# Altium PCB EN-C200_RA2.PcbDoc (part 1 of 3)
Units mil, origin at the board's own origin, x right, y up, seen from the top; angles counter-clockwise.
Board outline 4940 x 2525 mil, 2 copper layers (TOP, BOTTOM), stack 39.8 mil thick; 190 components, 128 nets, 643 pads, 1902 vias.
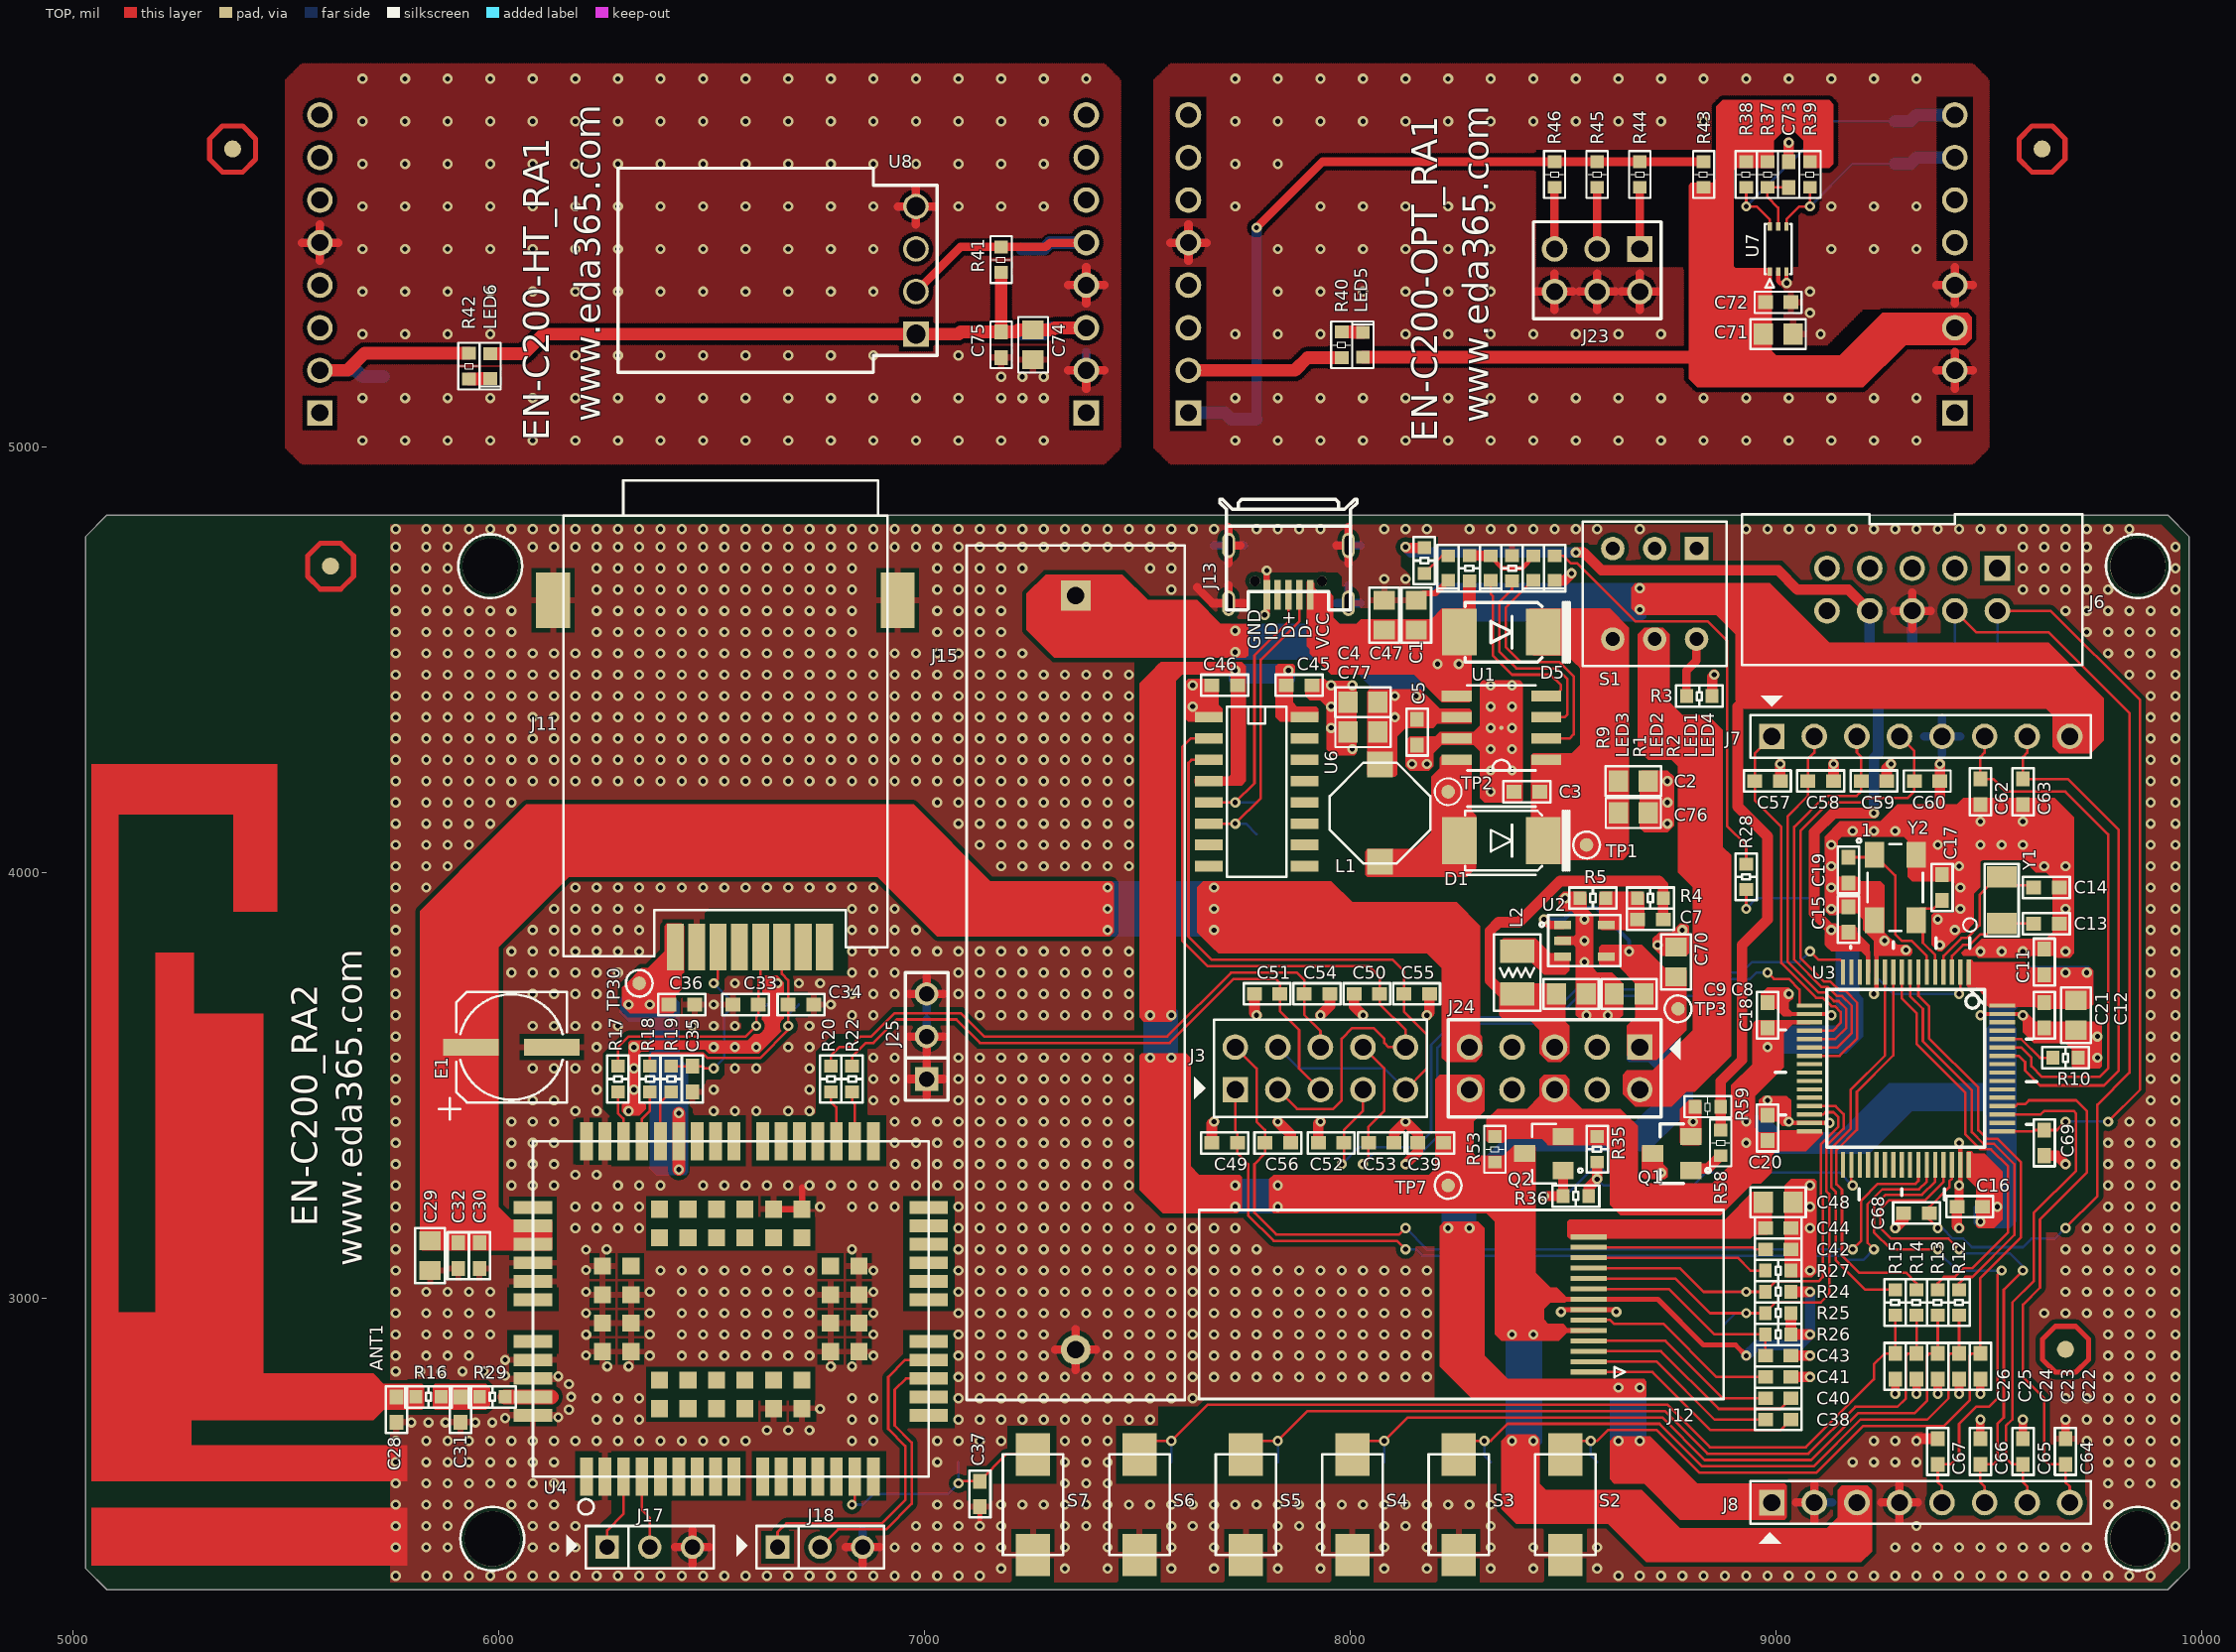
[diagram p0: TOP view]
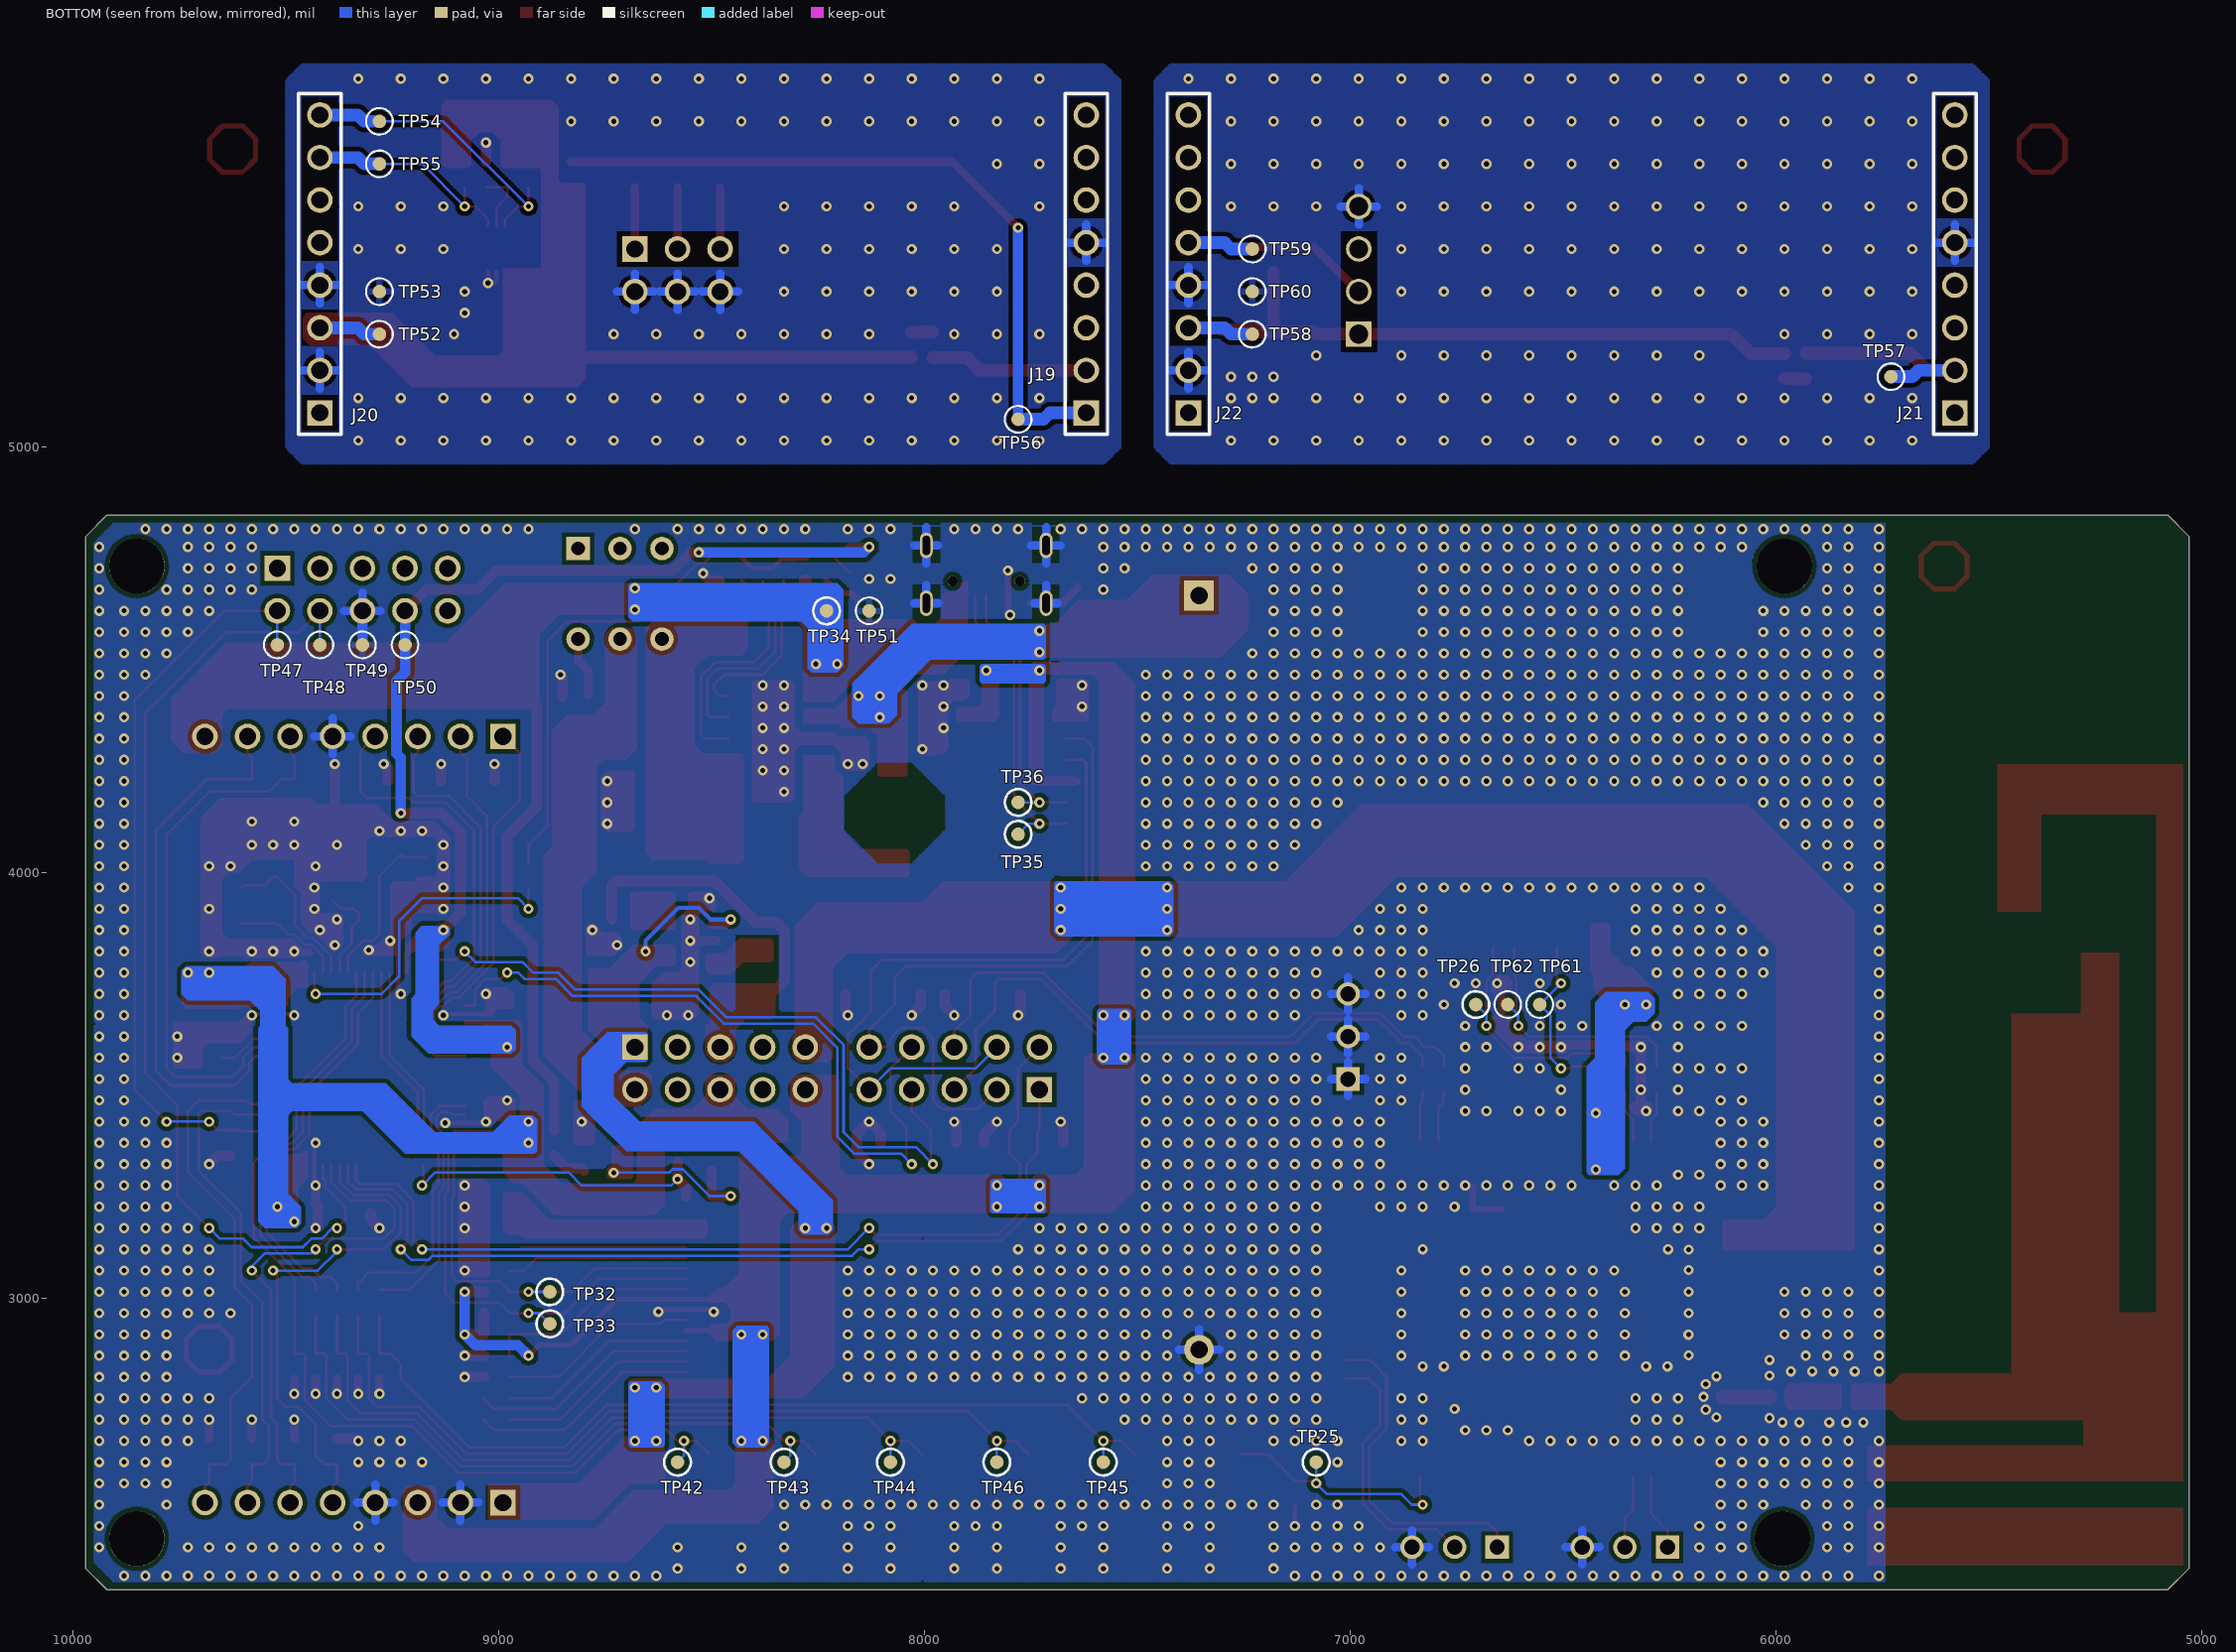
[diagram p1: BOTTOM view, seen from below]

## Layer stack, top to bottom
TOP: signal copper 1.4
Dielectric: core 37, FR-4, Dk 1
BOTTOM: signal copper 1.4

## Board outline
5030,2365 5080,2315 9920,2315 9970,2365 9970,4790 9920,4840 5080,4840 5030,4790

## Design rules (kind name [scope] priority, off if disabled: settings)
Clearance [(OnLayer('Keep-Out Layer'))] p1: gap=12
Clearance Clearance_2 [inpoly] p2: gap=10
Clearance Clearance_1 [All] p3: gap=6
ComponentClearance [All] p1: gap=-10 collisioncheckmode=3 verticalgap=-10 showdistances=FALSE
HoleSize [All] p1: absolutevalues=TRUE maxlimit=1000 minlimit=1 maxpercent=80.000 minpercent=20.000
PlaneConnect [All] p1: planeconnectstyle=Direct reliefexpansion=20 reliefentries=4 reliefconductorwidth=10 reliefairgap=10
PolygonConnect PolygonConnect_via [isvia] p1: connectstyle=Direct reliefconductorwidth=10 reliefentries=4 polygonreliefangle="90 Angle"
PolygonConnect [All] p2: connectstyle=Relief reliefconductorwidth=15 reliefentries=4 polygonreliefangle="90 Angle"
RoutingVias [All] p1: holewidth=12 width=24 viastyle="Through Hole" minholewidth=12 minwidth=24 maxholewidth=12 maxwidth=24
SilkToSilkClearance [All] p1: silktosilkclearance=1
SilkscreenOverComponentPads SilkToSolderMaskClearance [IsPad] p1: minsilkscreentomaskgap=2
SolderMaskExpansion [All] p1: expansion=2
Width [All] p1: maxlimit=100 minlimit=4 preferedwidth=10
23 further rules are at their usual default settings.

## Components (designator, comment, footprint, x,y, rotation, side; value= is the part's Value field where it differs from the comment)
C1 "CAP NP_SC0805_22UF" SC0805 8155,4605 r90 top
C2 "CAP NP_SC0805_22UF" SC0805 8665,4215 r0 top
C3 "CAP NP_SC0603_100NF" SC0603 8415,4190 r180 top
C4 "CAP NP_SC0805_22UF" SC0805 8030,4400 r180 top
C5 "CAP NP_SC0603_100NF" SC0603 8157,4330 r90 top
C7 "CAP NP_SC0603_5.6PF" SC0603 8705,3890 r180 top
C8 "CAP NP_SC0805_22UF" SC0805 8655,3715 r180 top
C9 "CAP NP_SC0805_22UF" SC0805 8519,3715 r0 top
C11 "CAP NP_SC0603_100NF" SC0603 9630,3790 r90 top
C12 "CAP NP_SC0805_22UF" SC0805 9705,3665 r270 top
C13 "CAP NP_SC0603_2.7PF" SC0603 9635,3880 r180 top
C14 "CAP NP_SC0603_2.7PF" SC0603 9635,3965 r180 top
C15 "CAP NP_SC0603_100NF" SC0603 9170,3890 r90 top
C16 "CAP NP_SC0603_100NF" SC0603 9455,3215 r0 top
C17 "CAP NP_SC0603_20PF" SC0603 9390,3965 r270 top
C18 "CAP NP_SC0603_100NF" SC0603 8980,3665 r270 top
C19 "CAP NP_SC0603_20PF" SC0603 9170,4006 r90 top
C20 "CAP NP_SC0603_100NF" SC0603 8980,3400 r270 top
C21 "CAP NP_SC0603_100NF" SC0603 9630,3665 r270 top
C22 "CAP NP_SC0603_10NF" SC0603 9480,2840 r270 top
C23 "CAP NP_SC0603_100NF" SC0603 9430,2840 r270 top
C24 "CAP NP_SC0603_100NF" SC0603 9380,2840 r270 top
C25 "CAP NP_SC0603_100NF" SC0603 9330,2840 r270 top
C26 "CAP NP_SC0603_100NF" SC0603 9280,2840 r270 top
C28 "CAP NP_SC0603_NC" SC0603 5760,2738.31 r90 top
C29 "CAP NP_SC0805_22UF" SC0805 5839,3100 r90 top
C30 "CAP NP_SC0603_20PF" SC0603 5955,3100 r90 top
C31 "CAP NP_SC0603_NC" SC0603 5910,2738.31 r90 top
C32 "CAP NP_SC0603_100NF" SC0603 5905,3100 r90 top
C33 "CAP NP_SC0603_33PF" SC0603 6580,3690 r180 top
C34 "CAP NP_SC0603_33PF" SC0603 6710,3690 r0 top
C35 "CAP NP_SC0603_33PF" SC0603 6455,3515 r270 top
C36 "CAP NP_SC0603_100NF" SC0603 6430,3690 r0 top
C37 "CAP NP_SC0603_100NF" SC0603 7130,2540 r90 top
C38 "CAP NP_SC0603_1UF" SC0603 9005,2715 r0 top
C39 "CAP NP_SC0603_100NF" SC0603 8189,3365 r0 top
C40 "CAP NP_SC0603_1UF" SC0603 9005,2765 r0 top
C41 "CAP NP_SC0603_NC" SC0603 9005,2815 r180 top
C42 "CAP NP_SC0603_1UF" SC0603 9005,3115 r180 top
C43 "CAP NP_SC0603_1UF" SC0603 9005,2865 r180 top
C44 "CAP NP_SC0603_100NF" SC0603 9005,3165 r180 top
C45 "CAP NP_SC0603_100NF" SC0603 7880,4440 r0 top
C46 "CAP NP_SC0603_100NF" SC0603 7705,4440 r0 top
C47 "CAP NP_SC0805_22UF" SC0805 8080,4605 r270 top
C48 "CAP NP_SC0805_22UF" SC0805 9005,3225 r180 top
C49 "CAP NP_SC0603_33PF" SC0603 7705,3365 r0 top
C50 "CAP NP_SC0603_33PF" SC0603 8039,3715 r0 top
C51 "CAP NP_SC0603_33PF" SC0603 7805,3715 r0 top
C52 "CAP NP_SC0603_33PF" SC0603 7955,3365 r0 top
C53 "CAP NP_SC0603_33PF" SC0603 8073,3365 r180 top
C54 "CAP NP_SC0603_33PF" SC0603 7922,3715 r180 top
C55 "CAP NP_SC0603_33PF" SC0603 8156,3715 r180 top
C56 "CAP NP_SC0603_33PF" SC0603 7830,3365 r180 top
C57 "CAP NP_SC0603_33PF" SC0603 8980,4215 r180 top
C58 "CAP NP_SC0603_33PF" SC0603 9105,4215 r180 top
C59 "CAP NP_SC0603_33PF" SC0603 9230,4215 r180 top
C60 "CAP NP_SC0603_33PF" SC0603 9355,4215 r180 top
C62 "CAP NP_SC0603_33PF" SC0603 9480,4190 r90 top
C63 "CAP NP_SC0603_33PF" SC0603 9580,4190 r90 top
C64 "CAP NP_SC0603_33PF" SC0603 9680,2640 r270 top
C65 "CAP NP_SC0603_33PF" SC0603 9580,2640 r270 top
C66 "CAP NP_SC0603_33PF" SC0603 9480,2640 r270 top
C67 "CAP NP_SC0603_33PF" SC0603 9380,2640 r270 top
C68 "CAP NP_SC0603_33PF" SC0603 9330,3200 r0 top
C69 "CAP NP_SC0603_33PF" SC0603 9630,3365 r90 top
C70 "CAP NP_SC0805_22UF" SC0805 8765,3790 r90 top
C71 "CAP NP_SC0805_22UF" SC0805 9005,5265 r0 top
C72 "CAP NP_SC0603_100NF" SC0603 9005,5340 r0 top
C73 "CAP NP_SC0603_1UF" SC0603 9030,5640 r90 top
C74 "CAP NP_SC0805_22UF" SC0805 7255,5240 r270 top
C75 "CAP NP_SC0603_100NF" SC0603 7180,5240 r270 top
C76 "CAP NP_SC0805_22UF" SC0805 8665,4140 r0 top
C77 "CAP NP_SC0805_22UF" SC0805 8030,4330 r180 top
D1 "DIODE_SD1714_SM340A" SD1714 8360,4075 r0 top
D5 "DIODE_SD1714_SM340A" SD1714 8360,4565 r0 top
E1 "CAP POL_CAP_SMD_6_3MM_100UF/50V" CAP_SMD_6_3MM 6030,3590 r90 top
J3 "CON10A_SIP-2X5P-100_2X5 2.54MM" SIP-2X5P-100 7930,3540 r180 top
J6 "CON10A_SIP-2X5P-100-DS_2X5 2.54" SIP-2X5P-100-DS 9320,4665 r0 top
J7 "HEADER8_SIP-8P-100_SIP8-2.54M_1" SIP-8P-100 9340,4320 r0 top
J8 "HEADER8_SIP-8P-100_SIP8-2.54M_1" SIP-8P-100 9340,2520 r0 top
J11 "SIM8-PUSH_SIM8-50_475530001" SIM8-50 6533.31,4333.86 r90 top
J12 "OLED_0.91_FPC14-25_QG-2832TSWFG" FPC14-25 8259.84,2985.35 r90 top
J13 "MICROUSB_MICROUSB_D_MICROUSB" MICROUSB_D 7855,4764.76 r180 top
J15 "BX0034_BX0034_BATTERY HOLDER NO" BX0034 7355,3765 r90 top
J17 "HEADER3_SIP-3P_SIP3-2.54/NC" SIP-3P 6354,2416 r0 top
J18 "HEADER3_SIP-3P_SIP3-2.54/NC" SIP-3P 6754,2416 r0 top
J19 "HEADER8_SIP-8P-100_SIP8-2.54MM" SIP-8P-100 7620,5430 r90 bottom
J20 "HEADER8_SIP-8P-100_SIP8-2.54MM" SIP-8P-100 9420,5430 r90 bottom
J21 "HEADER8_SIP-8P-100_SIP8-2.54MM" SIP-8P-100 5580,5430 r90 bottom
J22 "HEADER8_SIP-8P-100_SIP8-2.54MM" SIP-8P-100 7380,5430 r90 bottom
J23 "CON2X3_SIP-2X3P-100_SIP2X3-2.54" SIP-2X3P-100 8580,5415 r0 top
J24 "CON10A_SIP-2X5P-100_2X5 2.54MM" SIP-2X5P-100 8480,3540 r0 top
J25 "HEADER3_SIP-3P_SIP3-2.54/NC" SIP-3P 7004,3614 r90 top
L1 "TOROID IRON_SPL0505B_10UH" SPL0505B 8070,4140 r180 top
L2 "TOROID IRON_SL1008_2.2UH" SL1008 8392,3765 r270 top
LED1 "LED_HSD0603-LED_LTST-C191KRKT" HSD0603-LED 8430,4715 r270 top
LED2 "LED_HSD0603-LED_LTST-C191KGKT" HSD0603-LED 8330,4715 r270 top
LED3 "LED_HSD0603-LED_LTST-C191KRKT" HSD0603-LED 8230,4715 r270 top
LED4 "LED_HSD0603-LED_LTST-C191KGKT" HSD0603-LED 8480,4715 r270 top
LED5 "LED_HSD0603-LED_LTST-C191KGKT" HSD0603-LED 8030,5240 r90 top
LED6 "LED_HSD0603-LED_LTST-C191KGKT" HSD0603-LED 5980,5190 r270 top
Q1 "MPF6661_SOT23_AO3400" SOT23 8755.4,3340 r90 top
Q2 "A03401_SOT23_AO3401" SOT23 8455.4,3340 r90 top
R1 "RESISTOR_SR0603_4.7K" SR0603 8280,4715 r90 top
R2 "RESISTOR_SR0603_4.7K" SR0603 8380,4715 r270 top
R3 "RESISTOR_SR0603_1K" SR0603 8820,4415 r180 top
R4 "RESISTOR_SR0603_249K" SR0603 8705,3940 r0 top
R5 "RESISTOR_SR0603_54.9K" SR0603 8570,3940 r0 top
R9 "RESISTOR_SR0603_4.7K" SR0603 8174,4733 r270 top
R10 "RESISTOR_SR0603_100K" SR0603 9680,3565 r180 top
R12 "RESISTOR_SR0603_10K" SR0603 9430,2990 r90 top
R13 "RESISTOR_SR0603_10K" SR0603 9380,2990 r90 top
R14 "RESISTOR_SR0603_10K" SR0603 9330,2990 r90 top
R15 "RESISTOR_SR0603_10K" SR0603 9280,2990 r90 top
R16 "RESISTOR_SR0603_0R" SR0603 5835,2768.31 r0 top
R17 "RESISTOR_SR0603_22R" SR0603 6280,3515 r270 top
R18 "RESISTOR_SR0603_22R" SR0603 6355,3515 r270 top
R19 "RESISTOR_SR0603_22R" SR0603 6405,3515 r270 top
R20 "RESISTOR_SR0603_22R" SR0603 6780,3515 r270 top
R22 "RESISTOR_SR0603_22R" SR0603 6830,3515 r270 top
R24 "RESISTOR_SR0603_10K" SR0603 9005,3015 r0 top
R25 "RESISTOR_SR0603_10K" SR0603 9005,2965 r0 top
R26 "RESISTOR_SR0603_10K" SR0603 9005,2915 r0 top
R27 "RESISTOR_SR0603_820K" SR0603 9005,3065 r180 top
R28 "RESISTOR_SR0603_4.7K" SR0603 8930,3990 r90 top
R29 "RESISTOR_SR0603_0R" SR0603 5985,2768.31 r0 top
R35 "RESISTOR_SR0603_10K" SR0603 8580,3350 r90 top
R36 "RESISTOR_SR0603_1K" SR0603 8530,3240 r0 top
R37 "RESISTOR_SR0603_1K" SR0603 8980,5640 r270 top
R38 "RESISTOR_SR0603_10K" SR0603 8930,5640 r90 top
R39 "RESISTOR_SR0603_10K" SR0603 9080,5640 r90 top
R40 "RESISTOR_SR0603_4.7K" SR0603 7980,5240 r90 top
R41 "RESISTOR_SR0603_4.7K" SR0603 7180,5440 r90 top
R42 "RESISTOR_SR0603_4.7K" SR0603 5930,5190 r270 top
R43 "RESISTOR_SR0603_10K" SR0603 8830,5640 r90 top
R44 "RESISTOR_SR0603_1K" SR0603 8680,5640 r270 top
R45 "RESISTOR_SR0603_10K" SR0603 8580,5640 r270 top
R46 "RESISTOR_SR0603_100K" SR0603 8480,5640 r270 top
R53 "RESISTOR_SR0603_0/NC" SR0603 8340,3350 r90 top
R58 "RESISTOR_SR0603_1K" SR0603 8870,3365 r270 top
R59 "RESISTOR_SR0603_100K" SR0603 8840,3450 r180 top
S1 "SW_PUSH6_SW2X3-100_K8-8585D-L2" SW2X3-100 8715,4655 r180 top
S2 "PUSH-KEY_SW2-240X140_SKQMASE010" SW2-240X140 8505,2515 r0 top
S3 "PUSH-KEY_SW2-240X140_SKQMASE010" SW2-240X140 8255,2515 r0 top
S4 "PUSH-KEY_SW2-240X140_SKQMASE010" SW2-240X140 8005,2515 r0 top
S5 "PUSH-KEY_SW2-240X140_SKQMASE010" SW2-240X140 7755,2515 r0 top
S6 "PUSH-KEY_SW2-240X140_SKQMASE010" SW2-240X140 7505,2515 r0 top
S7 "PUSH-KEY_SW2-240X140_SKQMASE010" SW2-240X140 7255,2515 r180 top
TP1 "TP_TP32-SMD_" TP32-SMD#1 8713,4170.3 r0 top
TP2 "TP_TP32-SMD_" TP32-SMD#2 8230,4190 r0 top
TP3 "TP_TP32-SMD_" TP32-SMD#1 8928,3785.3 r0 top
TP7 "TP_TP32-SMD_TP" TP32-SMD#3 8024,3159.7 r180 top
TP25 "TP_TP32-SMD_" TP32-SMD#4 6922,2720.3 r0 bottom
TP26 "TP_TP32-SMD_" TP32-SMD#4 6547,3795.3 r0 bottom
TP30 "TP_TP32-SMD_" TP32-SMD#5 6172,3638.75 r180 top
TP32 "TP_TP32-SMD_" TP32-SMD#6 9038,2918.75 r0 bottom
TP33 "TP_TP32-SMD_" TP32-SMD#1 9038,2834.7 r0 bottom
TP34 "TP_TP32-SMD_" TP32-SMD#1 8388,4509.7 r0 bottom
TP35 "TP_TP32-SMD_" TP32-SMD#1 7938,3984.7 r0 bottom
TP36 "TP_TP32-SMD_" TP32-SMD#7 7938,4081.25 r0 bottom
TP42 "TP_TP32-SMD_" TP32-SMD#1 8738,2509.7 r0 bottom
TP43 "TP_TP32-SMD_" TP32-SMD#1 8488,2509.7 r0 bottom
TP44 "TP_TP32-SMD_" TP32-SMD#1 8238,2509.7 r0 bottom
TP45 "TP_TP32-SMD_" TP32-SMD#1 7738,2509.7 r0 bottom
TP46 "TP_TP32-SMD_" TP32-SMD#1 7988,2509.7 r0 bottom
TP47 "TP_TP32-SMD_" TP32-SMD#2 9520,4535 r0 bottom
TP48 "TP_TP32-SMD_" TP32-SMD#2 9420,4535 r0 bottom
TP49 "TP_TP32-SMD_" TP32-SMD#2 9320,4535 r0 bottom
TP50 "TP_TP32-SMD_" TP32-SMD#2 9220,4535 r0 bottom
TP51 "TP_TP32-SMD_" TP32-SMD#2 8130,4615 r0 bottom
TP52 "TP_TP32-SMD_" TP32-SMD#2 9280,5265 r0 bottom
TP53 "TP_TP32-SMD_" TP32-SMD#2 9280,5365 r0 bottom
TP54 "TP_TP32-SMD_" TP32-SMD#2 9280,5765 r0 bottom
TP55 "TP_TP32-SMD_" TP32-SMD#2 9280,5665 r0 bottom
TP56 "TP_TP32-SMD_" TP32-SMD#2 7780,5065 r0 bottom
TP57 "TP_TP32-SMD_" TP32-SMD#2 5730,5165 r0 bottom
TP58 "TP_TP32-SMD_" TP32-SMD#2 7230,5265 r0 bottom
TP59 "TP_TP32-SMD_" TP32-SMD#2 7230,5465 r0 bottom
TP60 "TP_TP32-SMD_" TP32-SMD#2 7230,5365 r0 bottom
TP61 "TP_TP32-SMD_" TP32-SMD#2 6555,3690 r0 bottom
TP62 "TP_TP32-SMD_" TP32-SMD#2 6630,3690 r0 bottom
U1 "TP5400_SOP8-50-150B_TP5400" SOP8-50-150B 8355,4340 r90 top
U2 "RT8059_SOT23-5_RT8059GJ5" SOT23-5 8550,3840 r270 top
U3 "STM32L431RX_QFP64D-050-1010L_ST" QFP64D-050-1010L 9305,3540 r180 top
U4 "BC35-G_BC35-G_(S1+S2)_BC35-G" BC35-G 6545,2975 r90 top
U6 "CH340C_SOP16-50-150A_CH340C" SOP16-50-150A 7780,4190 r270 top
U7 "BH1750HVI_BH1730FVC-WSOF6_BH175" BH1730FVC-WSOF6 9005,5465 r90 top
U8 "DHT11_SIP4-100-A_DHT11" SIP4-100-A 6655,5415 r90 top
Y1 "CRYSTAL2P_FC-135_110_32.768KHZ" FC-135_110 9530,3935 r270 top
Y2 "CRYSTAL4P_HSX4-0503B_8MHZ" HSX4-0503B 9280,3965 r270 top

## Footprints (in the part's own frame and the unit in brackets; to place one, negate y for a bottom-side part, rotate by r counter-clockwise, add the part's x,y. Pads: shape width x height; smd on the part's side, far side on the other; paste and mask are expansions set on the pad)
BC35-G [mil] "BC35-G"
  rect 90x30 smd: 1(-393.7,338.58) 2(-393.7,295.28) 3(-393.7,251.97) 4(-393.7,208.66) 5(-393.7,165.35) 6(-393.7,122.05) 7(-393.7,78.74) 8(-393.7,35.43) 9(-393.7,-7.87) 10(-393.7,-74.8) 11(-393.7,-118.11) 12(-393.7,-161.42) 13(-393.7,-204.72) 14(-393.7,-248.03) 15(-393.7,-291.34) 16(-393.7,-334.65) 28(393.7,-334.65) 29(393.7,-291.34) 30(393.7,-248.03) 31(393.7,-204.72) 32(393.7,-161.42) 33(393.7,-118.11) 34(393.7,-74.8) 35(393.7,-7.87) 36(393.7,35.43) 37(393.7,78.74) 38(393.7,122.05) 39(393.7,165.35) 40(393.7,208.66) 41(393.7,251.97) 42(393.7,295.28) 43(393.7,338.58)
  rect 30x90 smd: 17(-250,-464.57) 18(-206.69,-464.57) 19(-163.39,-464.57) 20(-120.08,-464.57) 21(-76.77,-464.57) 22(21.65,-464.57) 23(64.96,-464.57) 24(108.27,-464.57) 25(151.57,-464.57) 26(194.88,-464.57) 27(238.19,-464.57) 44(238.19,464.57) 45(194.88,464.57) 46(151.57,464.57) 47(108.27,464.57) 48(64.96,464.57) 49(21.65,464.57) 50(-76.77,464.57) 51(-120.08,464.57) 52(-163.39,464.57) 53(-206.69,464.57) 54(-250,464.57)
  rect 40x40 smd: 55(-234.25,167.32) 56(-234.25,100.39) 57(-234.25,33.47) 58(-234.25,-33.47) 59(-234.25,-100.39) 60(-234.25,-167.32) 61(-100.39,-301.18) 62(-33.47,-301.18) 63(33.47,-301.18) 64(100.39,-301.18) 65(234.25,-167.32) 66(234.25,-100.39) 67(234.25,-33.47) 68(234.25,33.47) 69(234.25,100.39) 70(234.25,167.32) 71(100.39,301.18) 72(33.47,301.18) 73(-33.47,301.18) 74(-100.39,301.18) 75(-167.32,167.32) 76(-167.32,100.39) 77(-167.32,33.47) 78(-167.32,-33.47) 79(-167.32,-100.39) 80(-167.32,-167.32) 81(-100.39,-234.25) 82(-33.47,-234.25) 83(33.47,-234.25) 84(100.39,-234.25) 85(167.32,-167.32) 86(167.32,-100.39) 87(167.32,-33.47) 88(167.32,33.47) 89(167.32,100.39) 90(167.32,167.32) 91(100.39,234.25) 92(33.47,234.25) 93(-33.47,234.25) 94(-100.39,234.25)
  silkscreen extent -483,-465 394,465
BH1730FVC-WSOF6 [mm] "BH1730FVC-WSOF6"
  rect 0.5x0.25 smd: 1(-1.35,0.5) 2(-1.35,0) 3(-1.35,-0.5) 4(1.35,-0.5) 5(1.35,0) 6(1.35,0.5)
  silkscreen extent -2.3,-0.8 1.5,0.8
BX0034 [mil] "BX0034"
  rect 70x70 / inner round 60 / far side rect 70x70 hole 40: 1(885.83,0)
  round 70 / inner round 60 / far side round 70 hole 40: 2(-885.83,0)
  silkscreen extent -1004,-256 1004,256
CAP_SMD_6_3MM [mil] "CAP_SMD_6_3MM"
  rect 40x130 smd: 1(0,95) 2(0,-95)
  silkscreen extent -170,-130 130,170
FC-135_110 [mil] "FC-135_110"
  rect 50x70 smd: 1(-55,0) 2(55,0)
  silkscreen extent -85,-40 85,40
FPC14-25 [mil] "FPC14-25"
  rect 12x85 smd: 1(-158.66,-300.2) 2(-134.25,-300.2) 3(-109.84,-300.2) 4(-85.43,-300.2) 5(-61.02,-300.2) 6(-36.61,-300.2) 7(-12.2,-300.2) 8(12.2,-300.2) 9(36.61,-300.2) 10(61.02,-300.2) 11(85.43,-300.2) 12(109.84,-300.2) 13(134.25,-300.2) 14(158.66,-300.2)
  silkscreen extent -222,-618 222,615
HSD0603-LED [mil] "HSD0603-LED"
  rect 30x32 smd: 1(-29,0) 2(29,0)
  silkscreen extent -55,-25 55,25
HSX4-0503B [mil] "HSX4-0503B"
  rect 60x45 smd: 1(-77,-49) 2(77,-49) 3(77,49) 4(-77,49)
  silkscreen extent -115,-90 102,65
MICROUSB_D [mm] "MICROUSB_D"
  rect 0.406x1.778 smd: 1(-1.3,2.85) 2(-0.65,2.85) 3(0,2.85) 4(0.65,2.85) 5(1.3,2.85)
  oval 0.762x1.524 / inner round 1.524 / far side oval 0.762x1.524 hole 1.15 slot 0.45 at 0 deg: 6(-3.575,3.35) 7(-3.575,-0.1) 8(3.575,-0.1) 9(3.575,3.35)
  round 0.61 / inner round 1.524 / far side round 0.61 hole 0.61 unplated: 10(-2,2.03) 11(2,2.03)
  silkscreen extent -4.1,-2.85 4.1,3.75
QFP64D-050-1010L [mil] "QFP64D-050-1010L"
  rect 10x60 smd: 1(-147.64,-226.38) 2(-127.95,-226.38) 3(-108.27,-226.38) 4(-88.58,-226.38) 5(-68.9,-226.38) 6(-49.21,-226.38) 7(-29.53,-226.38) 8(-9.84,-226.38) 9(9.84,-226.38) 10(29.53,-226.38) 11(49.21,-226.38) 12(68.9,-226.38) 13(88.58,-226.38) 14(108.27,-226.38) 15(127.95,-226.38) 16(147.64,-226.38) 33(147.64,226.38) 34(127.95,226.38) 35(108.27,226.38) 36(88.58,226.38) 37(68.9,226.38) 38(49.21,226.38) 39(29.53,226.38) 40(9.84,226.38) 41(-9.84,226.38) 42(-29.53,226.38) 43(-49.21,226.38) 44(-68.9,226.38) 45(-88.58,226.38) 46(-108.27,226.38) 47(-127.95,226.38) 48(-147.64,226.38)
  rect 60x10 smd: 17(226.38,-147.64) 18(226.38,-127.95) 19(226.38,-108.27) 20(226.38,-88.58) 21(226.38,-68.9) 22(226.38,-49.21) 23(226.38,-29.53) 24(226.38,-9.84) 25(226.38,9.84) 26(226.38,29.53) 27(226.38,49.21) 28(226.38,68.9) 29(226.38,88.58) 30(226.38,108.27) 31(226.38,127.95) 32(226.38,147.64) 49(-226.38,147.64) 50(-226.38,127.95) 51(-226.38,108.27) 52(-226.38,88.58) 53(-226.38,68.9) 54(-226.38,49.21) 55(-226.38,29.53) 56(-226.38,9.84) 57(-226.38,-9.84) 58(-226.38,-29.53) 59(-226.38,-49.21) 60(-226.38,-68.9) 61(-226.38,-88.58) 62(-226.38,-108.27) 63(-226.38,-127.95) 64(-226.38,-147.64)
  silkscreen extent -308,-353 307,308
SC0603 [mil] "SC0603"
  rect 35x32 smd: 1(-30,0) 2(30,0)
  silkscreen extent -55,-25 55,25
SC0805 [mil] "SC0805"
  rect 45x50 smd: 1(-35,0) 2(35,0)
  silkscreen extent -65,-35 65,35
SD1714 [mil] "SD1714"
  rect 82x110 smd: 1(-103.5,0) 2(93.5,0)
  silkscreen extent -90,-80 155,80
SIM8-50 [mil] "SIM8-50"
  rect 110x40 smd: 1(-508.86,118.31) 2(-508.86,68.31) 3(-508.86,18.31) 4(-508.86,-31.69) 5(-508.86,-81.69) 6(-508.86,-131.69) 7(-508.86,-181.69) 8(-508.86,-231.69)
  rect 130x80 smd: 9(306.1,-403.74) 10(306.1,405.31)
  silkscreen extent -531,-380 588,382
SIP4-100-A [mil] "SIP4-100-A"
  rect 60x60 / inner round 60 / far side rect 60x60 hole 45: 1(-150,-325)
  round 60 hole 45: 2(-50,-325) 3(50,-325) 4(150,-325)
  silkscreen extent -240,-375 240,375
SIP-2X3P-100 [mil] "SIP-2X3P-100"
  rect 60x60 / inner round 60 / far side rect 60x60 hole 40: 1(100,50)
  round 60 hole 40: 2(100,-50) 3(0,50) 4(0,-50) 5(-100,50) 6(-100,-50)
  silkscreen extent -150,-114 150,114
SIP-2X5P-100 [mil] "SIP-2X5P-100"
  rect 60x60 / inner round 60 / far side rect 60x60 hole 40: 1(200,50)
  round 60 hole 40: 2(200,-50) 3(100,50) 4(100,-50) 5(0,50) 6(0,-50) 7(-100,50) 8(-100,-50) 9(-200,50) 10(-200,-50)
  silkscreen extent -250,-114 250,114
SIP-2X5P-100-DS [mil] "SIP-2X5P-100-DS"
  rect 60x60 / inner round 60 / far side rect 60x60 hole 40: 1(200,50)
  round 60 hole 40: 2(200,-50) 3(100,50) 4(100,-50) 5(0,50) 6(0,-50) 7(-100,50) 8(-100,-50) 9(-200,50) 10(-200,-50)
  silkscreen extent -400,-177 400,177
SIP-3P [mil] "SIP-3P"
  rect 55x55 / inner round 60 / far side rect 55x55 hole 36: 1(-99,-1)
  round 55 / inner round 60 / far side round 55 hole 36: 2(1,-1) 3(101,-1)
  silkscreen extent -149,-51 151,49
SIP-8P-100 [mil] "SIP-8P-100"
  rect 60x60 / inner round 60 / far side rect 60x60 hole 40: 1(-350,0)
  round 60 hole 40: 2(-250,0) 3(-150,0) 4(-50,0) 5(50,0) 6(150,0) 7(250,0) 8(350,0)
  silkscreen extent -400,-50 400,50
SL1008 [mil] "SL1008"
  rect 55x80 smd: 1(-50,0) 2(50,0)
  silkscreen extent -90,-55 90,55
SOP8-50-150B [mil] "SOP8-50-150B"
  rect 25x70 smd: 1(-75,-105) 2(-25,-105) 3(25,-105) 4(75,-105) 5(75,105) 6(25,105) 7(-25,105) 8(-75,105)
  round 10 smd: 9(0,0)
  TOP region: -55,50 -55,-50 55,-50 55,50 -55,50
  silkscreen extent -100,-80 100,80
SOP16-50-150A [mil] "SOP16-50-150A"
  rect 25x65 smd: 1(-175,-112.5) 2(-125,-112.5) 3(-75,-112.5) 4(-25,-112.5) 5(25,-112.5) 6(75,-112.5) 7(125,-112.5) 8(175,-112.5) 9(175,112.5) 10(125,112.5) 11(75,112.5) 12(25,112.5) 13(-25,112.5) 14(-75,112.5) 15(-125,112.5) 16(-175,112.5)
  silkscreen extent -200,-70 200,70
SOT23 [mil] "SOT23"
  rect 40x50 smd: 1(-40,-44.6) 2(40,-44.6) 3(0,45.4)
  silkscreen extent -70,-90 70,28
SOT23-5 [mil] "SOT23-5"
  rect 20x40 smd: 1(-37.4,-51.18) 2(0,-51.18) 3(37.4,-51.18) 4(37.4,51.18) 5(-37.4,51.18)
  silkscreen extent -60,-105 60,85
SPL0505B [mil] "SPL0505B"
  rect 60x60 smd: 1(0,114.17) 2(0,-114.17)
  silkscreen extent -118,-118 118,118
SR0603 [mil] "SR0603"
  rect 30x32 smd: 1(-30,0) 2(30,0)
  silkscreen extent -55,-25 55,25
SW2-240X140 [mil] "SW2-240X140"
  rect 80x100 smd: 1(0,118.11) 2(0,-118.11)
  silkscreen extent -71,-118 71,118
SW2X3-100 [mil] "SW2X3-100"
  rect 55x55 / inner round 60 / far side rect 55x55 hole 32: 1(-98.42,-106.3)
  round 55 / inner round 60 / far side round 55 hole 32: 2(0,-106.3) 3(98.42,-106.3) 4(-98.42,106.3) 5(0,106.3) 6(98.42,106.3)
  silkscreen extent -169,-169 169,169
TP32-SMD#1 [mil] "TP32-SMD"
  round 32 smd: 1(-158,-105.3)
  silkscreen extent -189,-137 -127,-74
TP32-SMD#2 [mil] "TP32-SMD"
  round 32 smd: 1(0,0)
  silkscreen extent -31,-31 31,31
TP32-SMD#3 [mil] "TP32-SMD"
  round 32 smd: 1(-206,-105.3)
  silkscreen extent -237,-137 -175,-74
TP32-SMD#4 [mil] "TP32-SMD"
  round 32 smd: 1(158,105.3)
  silkscreen extent 127,74 189,137
TP32-SMD#5 [mil] "TP32-SMD"
  round 32 smd: 1(-158,-101.25)
  silkscreen extent -189,-133 -127,-70
TP32-SMD#6 [mil] "TP32-SMD"
  round 32 smd: 1(-158,-96.25)
  silkscreen extent -189,-128 -127,-65
TP32-SMD#7 [mil] "TP32-SMD"
  round 32 smd: 1(-158,-83.75)
  silkscreen extent -189,-115 -127,-52

## Free pads (board coordinates)
  round 40 smd: 1(5375,5700) 1(5605,4720) 1(9625,5700) 1(9680,2880)
  round 130 hole 129.92 unplated: 1(5980,4720) 1(5985,2435) 1(9850,2435) 1(9850,4720)

## Via types
v1: diameter 24, hole 12, TOP to BOTTOM, tented both sides, 1902 vias

## Nets (pads, with @x,y where several pads share a name; then routed paths per layer and width w, separated by ;. In a path a pad name is that pad's centre, name@x,y a point inside that pad or via, vN(x,y) a via of type N, cw(c..) or ccw(c..) an arc to the next point about the centre after c; other vN are vias at no path point)
+3.3: C11.1 C12.1 C15.1 C16.2 C18.2 C20.2 C21.1 J6.8 J24.6 Q2.2 R9.1 R35.2 R53.2 TP50.1 U3.1 U3.13 U3.19 U3.32 U3.48 U3.64 | length 2196.1
  TOP w10: 9019.27,3648.27 U3.19@9078.62,3648.27 ; U3.13@9216.42,3766.38 9216.42,3813.58
  TOP w24: v1(8530,4752) 8548,4752 8590,4710 9005,4710 9050,4665 9170,4665 J6.8@9220,4615
  TOP w25: v1(8130,4765) 8132,4763 R9.1@8174,4763 ; v1(9130,3865) 9090,3905 9090,4095 9135,4140 v1(9230,4140)
  BOTTOM w25: v1(8130,4765) 8143,4752 v1(8530,4752) ; J6.8@9220,4615 TP50.1@9220,4535 9220,4470 9240,4450 9240,4280 9230,4270 v1(9230,4140)
  other v1: 9480,3180 9520,3215 8930,3365 8930,3415 8980,3590 9680,3765 9730,3765
+5.0: C2.1 C3.1 C76.1 D1.2 D5.2 S1.6 TP1.1 U1.1
CH340_RX: C55.2 J3.4 J3.9 U6.3 | length 1661.5
  TOP w6: U6.3@7667.5,4265 7627,4265 7620,4258 7620,3850 7675,3795 8100,3795 8126,3769 C55.2@8126,3715 8126,3674 8180,3620 8180,3540 J3.9@8130,3490
  BOTTOM w6: J3.4@7830,3590 7880,3540 8080,3540 J3.9@8130,3490
CH340_TX: C50.2 J3.3 J3.10 U6.2 | length 1722
  TOP w6: U6.2@7667.5,4315 7625,4315 7605,4295 7605,3840 7665,3780 8044,3780 8069,3755 C50.2@8069,3715 8069,3691 8130,3630 J3.10@8130,3590 8090,3590 8080,3600 8080,3610 8055,3635 8005,3635 7980,3610 7980,3465 7960,3445 7875,3445 J3.3@7830,3490